# Altium PCB PCB.PcbDoc
Units mm, origin at the board's own origin, x right, y up, seen from the top; angles counter-clockwise.
Board outline 79 x 62 mm, 4 copper layers (Top Layer, Mid-Layer 1, Mid-Layer 2, Bottom Layer), stack 1.448 mm thick; 26 components, 26 nets, 103 pads, 28 vias.
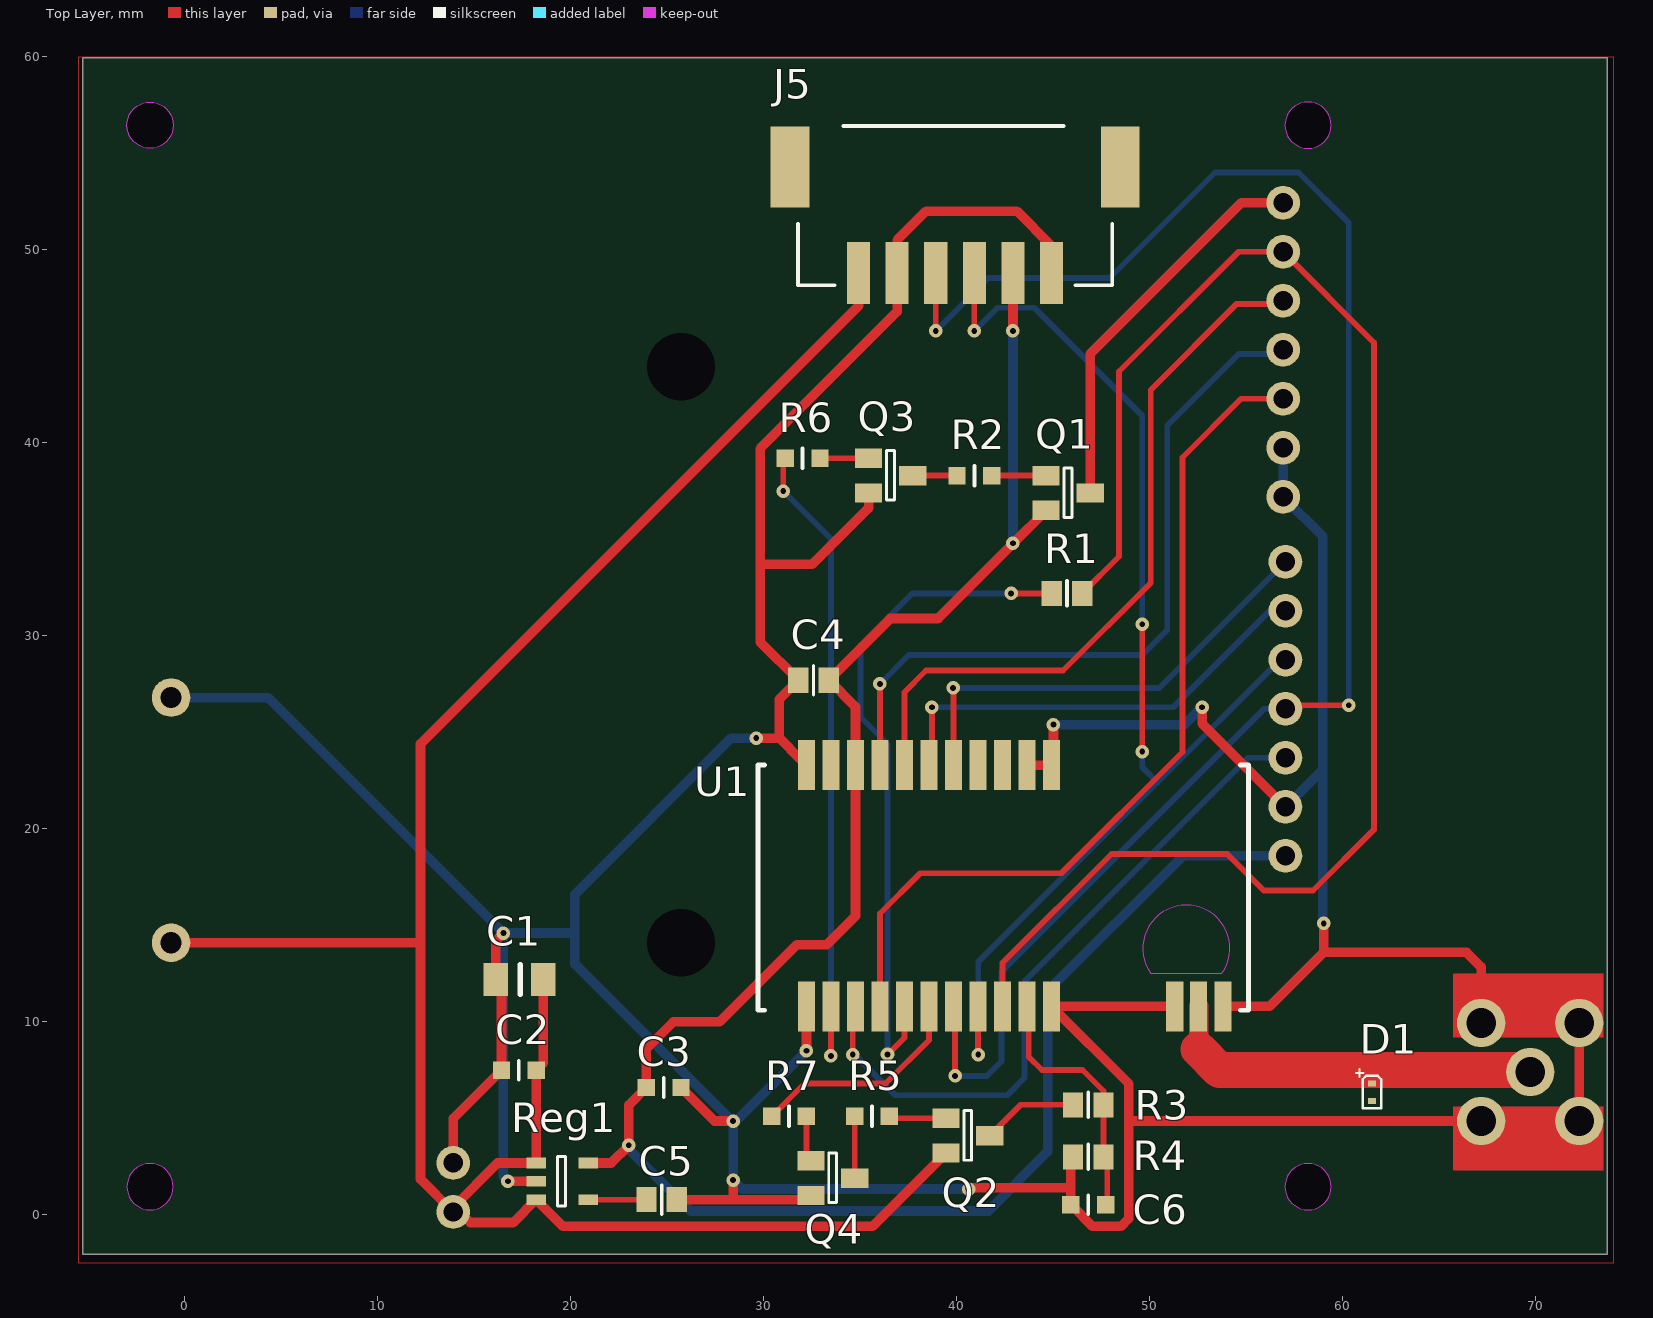
[diagram p0: Top Layer view]
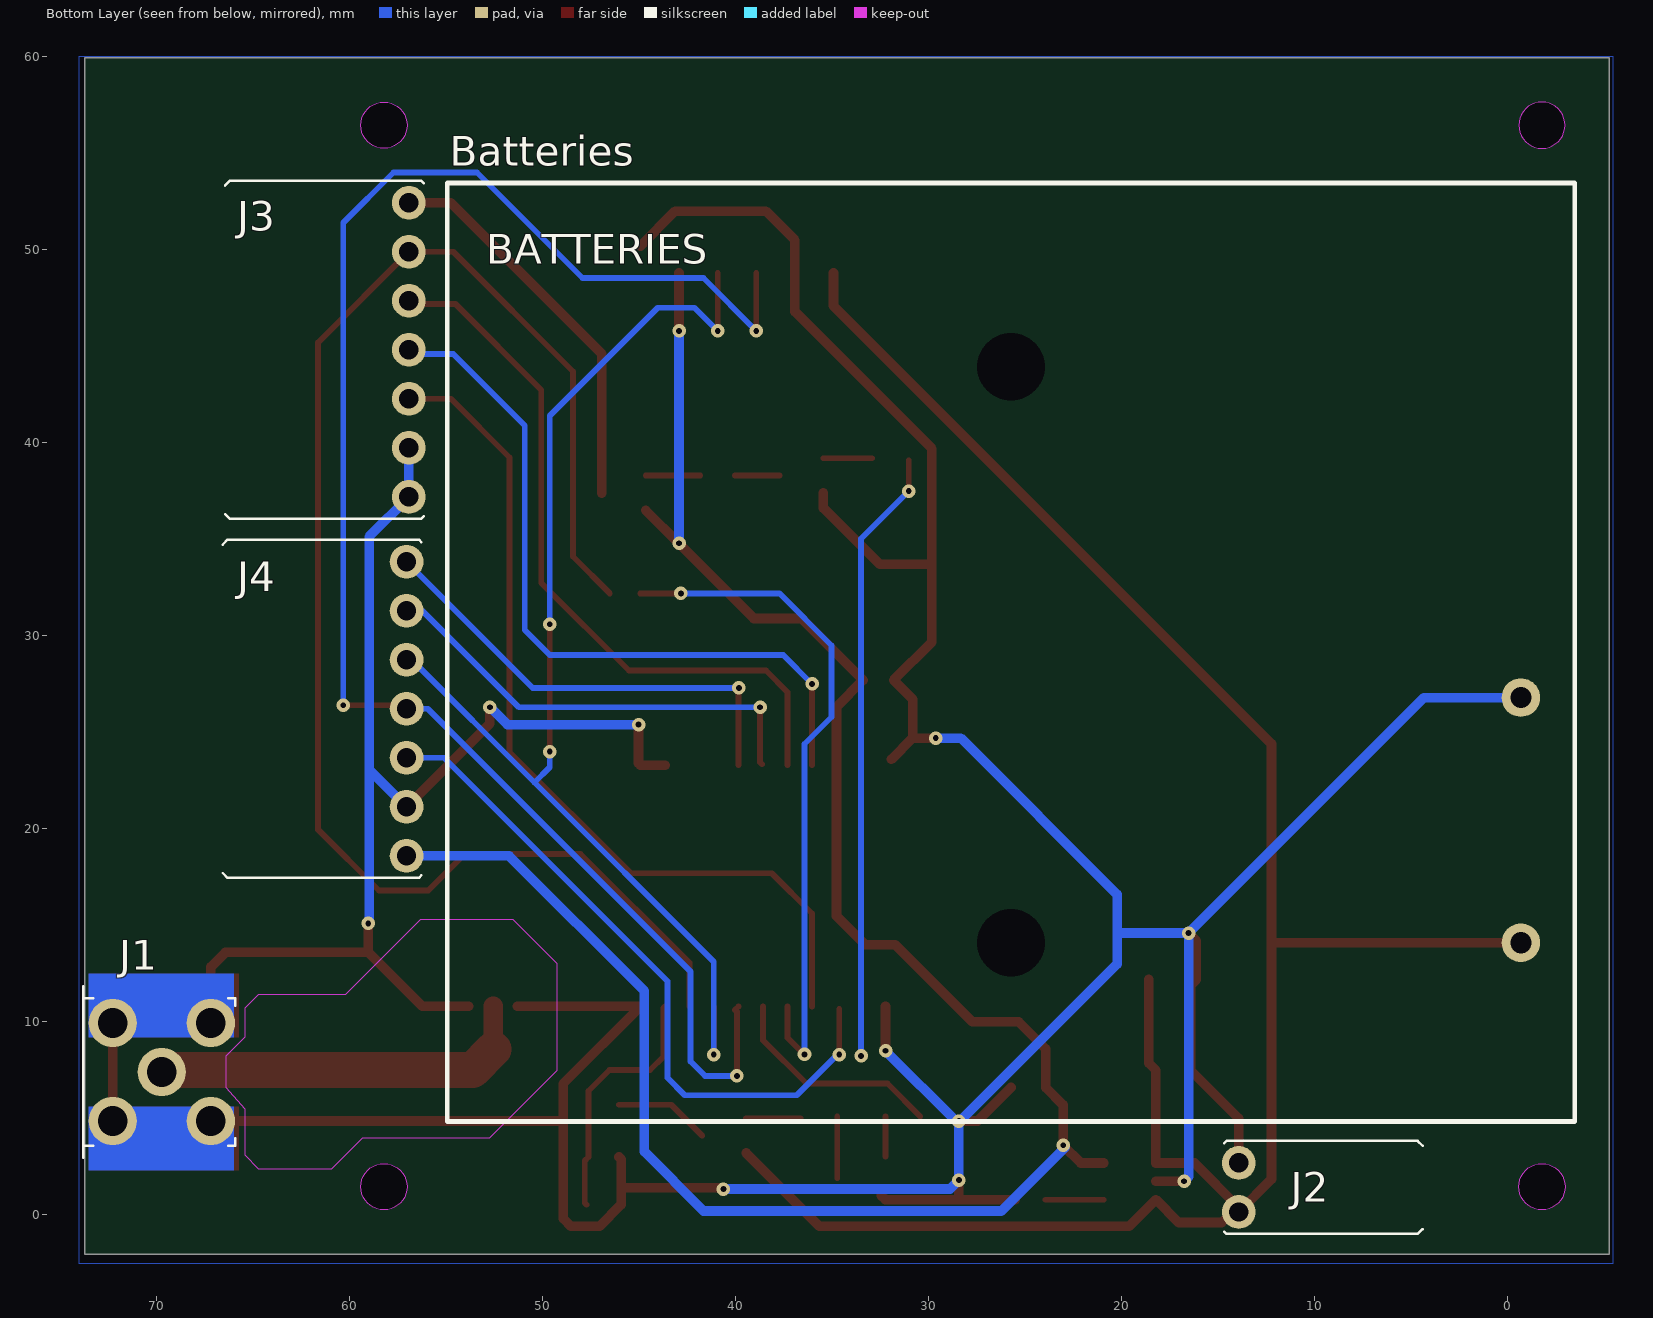
[diagram p1: Bottom Layer view, seen from below]
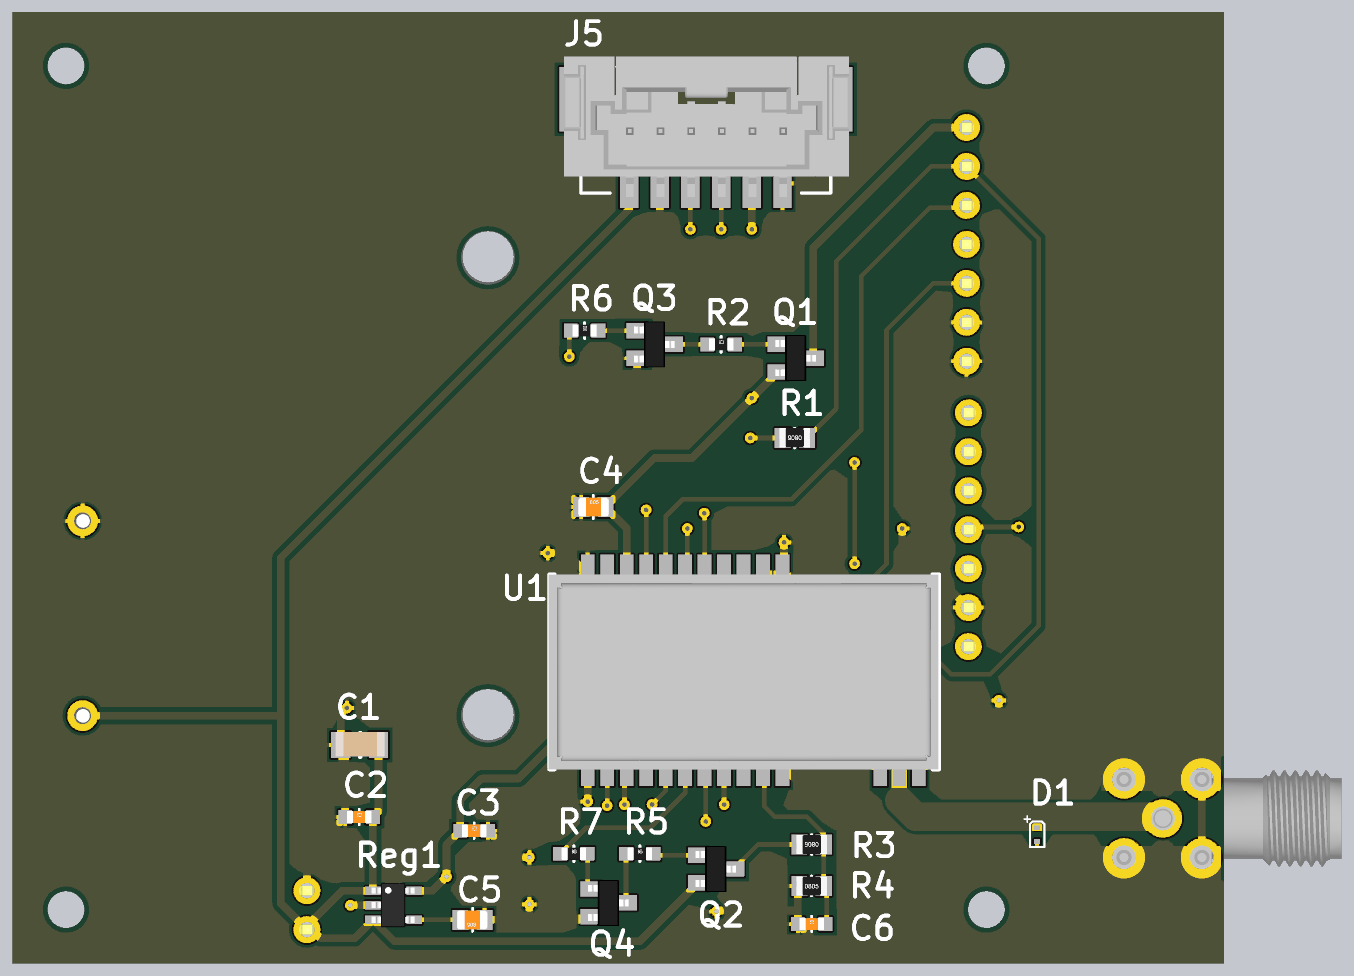
[diagram p2: 3D render of the assembled board from above, using the file's embedded part models]
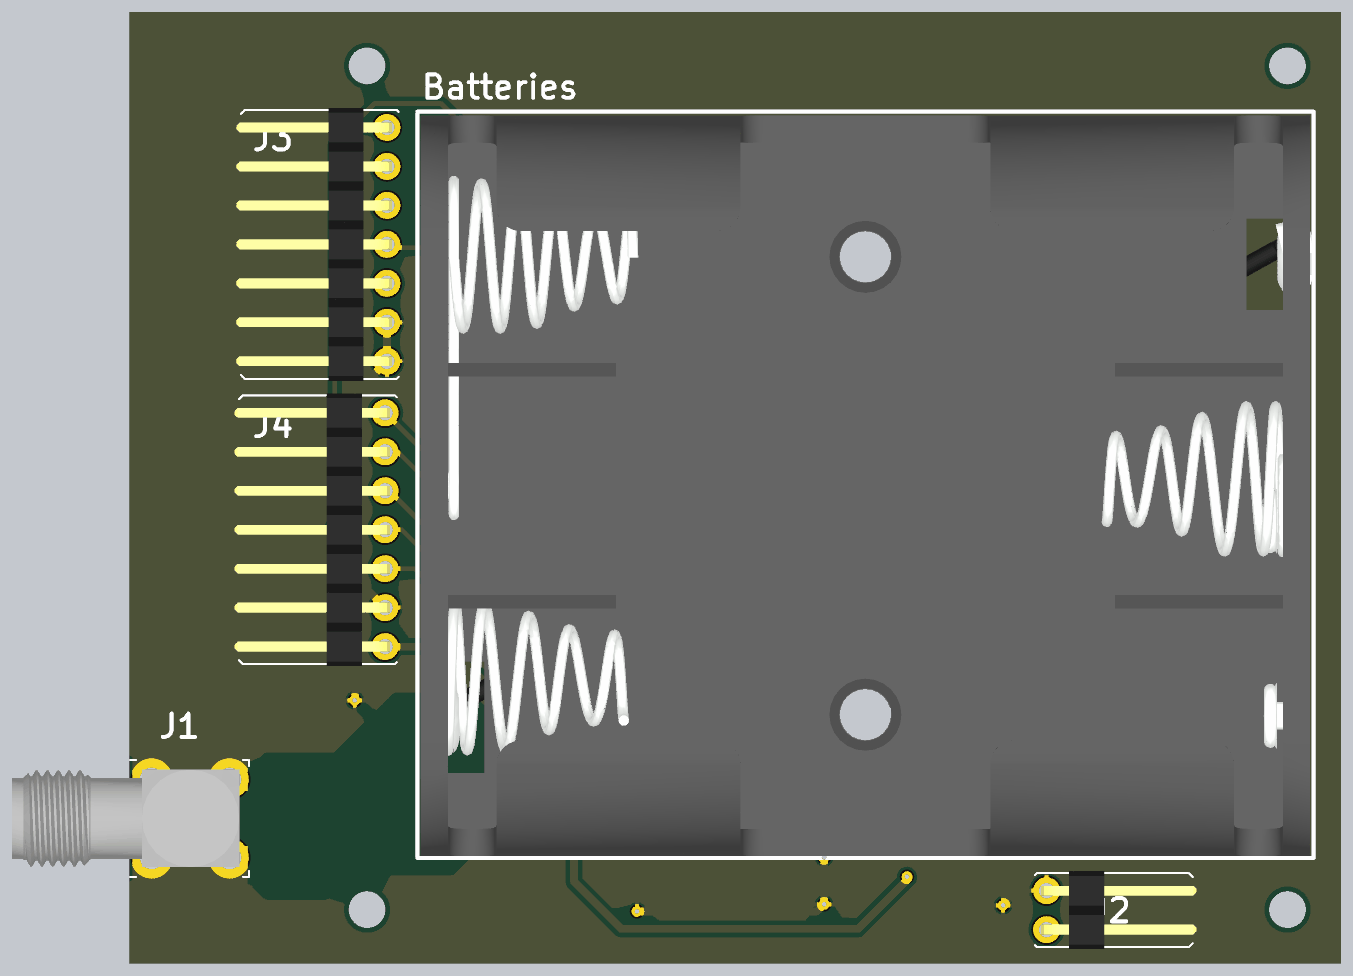
[diagram p3: 3D render of the assembled board from below, using the file's embedded part models]

## Layer stack, top to bottom
Top Solder: solder mask 0.0102, Solder Resist, Dk 3.5
Top Layer: signal copper 0.0356
Dielectric1: core 0.288, FR-4, Dk 4.8
Mid-Layer 1: signal copper 0.0356
Dielectric2: prepreg 0.73, FR-4, Dk 4.8
Mid-Layer 2: signal copper 0.0356
Dielectric3: core 0.288, FR-4, Dk 4.8
Bottom Layer: signal copper 0.0356
Bottom Solder: solder mask 0.0102, Solder Resist, Dk 3.5

## Board outline
-5.306,-2.044 73.694,-2.044 73.694,59.956 -5.306,59.956
cut-out: 56.994,56.456 ccw(c58.194,56.456) 58.194,55.256 ccw(c58.194,56.456) 59.394,56.456 ccw(c58.194,56.456) 58.194,57.656 ccw(c58.194,56.456)
cut-out: -3.006,1.456 ccw(c-1.806,1.456) -1.806,0.256 ccw(c-1.806,1.456) -0.606,1.456 ccw(c-1.806,1.456) -1.806,2.656 ccw(c-1.806,1.456)
cut-out: 56.994,1.456 ccw(c58.194,1.456) 58.194,0.256 ccw(c58.194,1.456) 59.394,1.456 ccw(c58.194,1.456) 58.194,2.656 ccw(c58.194,1.456)
cut-out: -1.806,55.256 cw(c-1.806,56.456) -3.006,56.456 cw(c-1.806,56.456) -1.806,57.656 cw(c-1.806,56.456) -0.606,56.456 cw(c-1.806,56.456)

## Design rules (kind name [scope] priority, off if disabled: settings)
AssemblyTestPointUsage [All] p1: valid=2
Clearance RF [InNet('RF') vs InNet('GND')] p1: gap=0.2
Clearance [All] p2: gap=0.3
FabricationTestPointUsage [All] p1: valid=2 allowmultiple=FALSE
HoleSize [All] p1: absolutevalues=TRUE maxlimit=5 minlimit=0.025 maxpercent=80.000 minpercent=20.000
MinimumSolderMaskSliver [All] p1: minsoldermaskwidth=0.07
PolygonConnect [All] p1: connectstyle=Relief reliefconductorwidth=0.254 reliefentries=4 polygonreliefangle="90 Angle" airgapwidth=0.254
RoomDefinition schema [InComponentClass('schema')] p1: confinementstyle=ConfineIn formatcopy=TRUE lockcomponents=FALSE outline -5.8,-3.3 81.9,-3.3 81.9,65.3 -5.8,65.3
RoutingVias [All] p1: holewidth=0.3 width=0.7 viastyle="Through Hole" minholewidth=0.3 minwidth=0.7 maxholewidth=4 maxwidth=4
SilkToSilkClearance [All] p1: silktosilkclearance=0.1
SilkToSolderMaskClearance SilkscreenOverComponentPads [IsPad] p1: minsilkscreentomaskgap=0.125 clearancetoexposedcopper=TRUE
SolderMaskExpansion [All] p1: expansion=0.125
Width [All] p1: maxlimit=5 minlimit=0.15 preferedwidth=0.15
24 further rules are at their usual default settings.

## Classes and differential pairs
net class Undefined: SENSOR_1_EN SENSOR_2_EN VBAT VBAT_EN

## Components (designator, comment, footprint, x,y, rotation, side; value= is the part's Value field where it differs from the comment)
Batteries "Comment" KEYSTONE-2464 25.7,14.1 r180 bottom
C1 "CAP-SMD" C1206-STD 16.1,12.191 r0 top
C2 "CAP-SMD" C0603-STD 17.3,7.491 r0 top
C3 "CAP-SMD" C0603-STD 24.8,6.6 r0 top
C4 "CAP-SMD" C0805-STD 32.57,27.7 r0 top
C5 "CAP-SMD" C0805-STD 24.7,0.786 r180 top
C6 "CAP-SMD" C0603-STD 46.8,0.524 r0 top
D1 "ESD9R33ST5G-SOD923" SOD923-SPE-ESD9R33ST5G 61.5,5.9 r90 top
J1 "COAX-RF" SMA-STD-Right_Angle 69.7,7.4 r180 bottom
J2 "CONN-STD-2P_1ROW" CONN-STD-2_254_MALE_HEADER 13.9,2.691 r270 bottom
J3 "CONN-STD-7P_1ROW" CONN-STD-7_254_MALE_HEADER 56.9,37.2 r90 bottom
J4 "CONN-STD-7P_1ROW" CONN-STD-7_254_MALE_HEADER 57.017,18.6 r90 bottom
J5 "CONN-STD-6P_1ROW" CONN-SPE-560020-0620_MOLEX 44.9,48.8 r180 top
Q1 "BC856A-SOT23" SOT23-STD 46.9,37.4 r180 top
Q2 "BC856A-SOT23" SOT23-STD 41.7,4.1 r180 top
Q3 "BC846ALT1-SOT23" SOT23-STD 37.7,38.3 r180 top
Q4 "BC846ALT1-SOT23" SOT23-STD 34.7,1.9 r180 top
R1 "RES-SMD" R0805-STD 45.7,32.2 r180 top
R2 "RES-SMD" R0603-STD 40.9,38.3 r0 top
R3 "RES-SMD" R0805-STD 46.8,5.7 r180 top
R4 "RES-SMD" R0805-STD 46.8,3 r0 top
R5 "RES-SMD" R0603-STD 35.6,5.1 r0 top
R6 "RES-SMD" R0603-STD 32,39.2 r0 top
R7 "RES-SMD" R0603-STD 31.3,5.1 r0 top
Reg1 "TPS73133DBVTG4-SOT23_5" SOT23_5-SPE-TPS73133DBVTG4 18.2,2.691 r0 top
U1 "TD1208-LGA25" LGA25-SPE-TD1208 44.9,23.3 r180 top

## Footprints (in the part's own frame and the unit in brackets; to place one, negate y for a bottom-side part, rotate by r counter-clockwise, add the part's x,y. Pads: shape width x height; smd on the part's side, far side on the other; paste and mask are expansions set on the pad)
C0603-STD [mm]
  rect 0.9x0.9 smd: 1(-0.9,0) 2(0.9,0)
  silkscreen extent 0,-0.51 0,0.51, body extent -0.8,-0.4 0.8,0.4, height 0.3
C0805-STD [mm]
  rect 1.05x1.3 smd: 1(-0.787,0) 2(0.787,0)
  silkscreen extent 0,-0.76 0,0.76, body extent -0.98,-0.62 1.02,0.62, height 0.76
C1206-STD [mm]
  rect 1.25x1.7 smd: 1(0,0) 2(2.464,0)
  silkscreen extent 1.27,-0.76 1.27,0.76, body extent -0.33,-0.76 2.87,0.84, height 0.79
CONN-SPE-560020-0620_MOLEX [mm]
  rect 1.2x3.2 smd: 1(0,0) 2(2,0) 3(4,0) 4(6,0) 5(8,0) 6(10,0)
  rect 2x4.2 smd: M1(-3.55,-5.48) M2(13.55,-5.48)
  silkscreen extent -3.15,-7.62 13.15,0.64, body extent -4.35,-8.26 14.25,0.89, height 7.99
CONN-STD-2_254_MALE_HEADER [mm]
  round 1.75 hole 1: 1(0,0) 2(2.54,0)
  silkscreen extent -1.14,-0.76 3.68,9.53, body extent -1.27,-0.37 3.81,9.76, height 2.51
CONN-STD-7_254_MALE_HEADER [mm]
  round 1.75 hole 1: 1(0,0) 2(2.54,0) 3(5.08,0) 4(7.62,0) 5(10.16,0) 6(12.7,0) 7(15.24,0)
  silkscreen extent -1.14,-0.76 16.38,9.53, body extent -1.27,-0.32 16.51,9.81, height 2.51
KEYSTONE-2464 [mm]
  round 2 hole 1.1: 1(26.42,0) 2(26.42,12.7)
  round 1.524 hole 3.5 unplated: X(0,0) X(0,29.85)
  silkscreen extent -29.21,-9.27 29.21,39.37, body extent -29.01,-9.16 29.08,39.13, height 16.9
LGA25-SPE-TD1208 [mm]
  rect 0.89x2.6 smd: 1(0,0) 2(1.27,0) 3(2.54,0) 4(3.81,0) 5(5.08,0) 6(6.35,0) 7(7.62,0) 8(8.89,0) 9(10.16,0) 10(11.43,0) 11(12.7,0) 12(12.7,12.5) 13(11.43,12.5) 14(10.16,12.5) 15(8.89,12.5) 16(7.62,12.5) 17(6.35,12.5) 18(5.08,12.5) 19(3.81,12.5) 20(2.54,12.5) 21(1.27,12.5) 22(0,12.5) 23(-6.38,12.5) 24(-7.62,12.5) 25(-8.89,12.5)
  Top Layer keep-out region: -8.831,10.795 -9.221,9.786 -9.095,8.711 -8.483,7.818 -7.526,7.314 -6.444,7.314 -5.487,7.818 -4.875,8.711 -4.749,9.786 -5.139,10.795 -5.139,10.795
  silkscreen extent -10.2,0 15.2,12.7, body extent -10.16,0 15.24,12.7, height 3.55
R0603-STD [mm]
  rect 0.9x0.9 smd: 1(-0.9,0) 2(0.9,0)
  silkscreen extent 0,-0.51 0,0.51, body extent -0.8,-0.4 0.8,0.4, height 0.3
R0805-STD [mm]
  rect 1.05x1.3 smd: 1(-0.787,0) 2(0.787,0)
  silkscreen extent 0,-0.64 0,0.64, body extent -1,-0.64 1,0.61, height 0.6
SMA-STD-Right_Angle [mm]
  round 2.5 hole 1.54: 1(0,0) 2(-2.54,-2.54) 2(-2.54,2.54) 2(2.54,-2.54) 2(2.54,2.54)
  silkscreen extent -4.06,-4.44 3.81,4.45, body extent -11.63,-3.18 3.17,3.18, height 10.07
SOD923-SPE-ESD9R33ST5G [mm]
  rect 0.3x0.4 smd: A(0,0) K(0.9,0)
  silkscreen extent -0.38,-0.48 1.65,0.83, body extent -0.07,-0.32 0.97,0.32, height 0.43
SOT23-STD [mm]
  rect 1.4x1 smd: 1(2.275,-0.9) 2(2.275,0.9)
  rect 1.425x1 smd: 3(0,0)
  silkscreen extent 0.94,-1.3 1.35,1.27, body extent -0.18,-1.5 2.46,1.5, height 1.08
SOT23_5-SPE-TPS73133DBVTG4 [mm]
  rect 1x0.55 smd: 1(0,-0.005) 2(0,-0.955) 3(0,-1.905) 4(2.7,-1.905) 5(2.7,-0.005)
  silkscreen extent 1.11,-2.23 1.51,0.34, body extent -0.08,-2.39 2.72,0.51, height 1.43

## Part data
C1: library part C1206C106K3RACxx, "1206 10uF / 25V X7R ceramic capacitor"
C2 C3 C6: library part C0603C104K3RACXX, "0603 100nF /25V X7R ceramic capacitor"
C4: library part C0805C106K9PACxx, "0805 10uF / 6.3V X5R ceramic capacitor"
C5: library part VJ0805Y103KXAxx, "0805 10nF / 50V X7R ceramic capacitor"
D1: library part ESD9R3.3ST5G, "Diode TVS 3.3V in SMD package"
J1: library part 73391-0080, "SMA Right Angle"
J2: library part 826949-2, "2 PIN, 2.54mm pitch, 1 row, right angle, male"
J3 J4: library part 826949-7, "7 PIN, 2.54mm pitch, 1 row, right angle, male"
J5: library part 560020-0620, "6 pin, 2mm pitch herader, SM, ST"
Q1 Q2: library part BC856A, "PNP small signal transistor"
Q3 Q4: library part BC846ALT1, "NPN small signal transistor"
R1: library part CRCW080530K0FKxx, "30k Ohm 0805 SMD resistor"
R2 R5: library part CRCW06031K00FKxx, "1k Ohm 0603 SMD resistor"
R3 R4: library part CRCW0805100KFKxx, "100k Ohm 0805 SMD resistor"
R6 R7: library part CRCW060322K0FKxx, "22k Ohm 0603 SMD resistor"
Reg1: library part TPS73133, "3.3V / 150mA LDO voltage regulator"
U1: library part TD1208-C32, "Sigfox module"

## Via types
v1: diameter 0.7, hole 0.3, Top Layer to Bottom Layer, 28 vias

## Nets (pads, with @x,y where several pads share a name; then routed paths per layer and width w, separated by ;. In a path a pad name is that pad's centre, name@x,y a point inside that pad or via, vN(x,y) a via of type N, cw(c..) or ccw(c..) an arc to the next point about the centre after c; other vN are vias at no path point)
3.3V: C3.1 C4.2 J4.1 J5.2 Q1.2 Reg1.5 U1.9 | length 111.4
  Top Layer w0.5: Reg1.5 22.085,2.686 v1(22.999,3.6) 22.999,5.699 C3.1 23.9,8.6 25.3,10 27.7,10 31.7,14 33.257,14 34.74,15.483 U1.9 34.74,26.317 C4.2 36.557,30.9 39.025,30.9 v1@42.913,34.787 ; v1(42.9,34.8) v1@42.913,34.787 ; v1(42.9,45.8) J5.2 ; Q1.2 v1@42.913,34.787
  Bottom Layer w0.5: v1(22.999,3.6) 22.9,3.5 26.2,0.2 41.63,0.2 44.7,3.27 44.7,11.6 51.7,18.6 J4.1 ; v1(42.9,34.8) v1(42.9,45.8)
5V: Batteries.1 C1.2 C2.2 J2.2 J5.6 Q2.2 Reg1.1 Reg1.3 | length 114.9
  Top Layer w0.3: 12.1,14.1 12.2,14.2
  Top Layer w0.5: Batteries.1 12.1,14.1 ; J2.2@14.23,0.151 14.781,-0.4 17.014,-0.4 Reg1.3 19.586,-0.6 35.625,-0.6 Q2.2 ; C1.2 18.564,7.855 C2.2 Reg1.1 16.196,2.686 13.9,0.39 J2.2 12.2,1.851 12.2,14.2 12.2,24.4 34.9,47.1 J5.6
DB2: J4.6 U1.6 | length 23.4
  Top Layer w0.3: U1.6@38.6,23.35 38.7,23.45 v1(38.7,26.3)
  Bottom Layer w0.3: v1(38.7,26.3) 51.2,26.3 56.2,31.3 J4.6
DB3: J4.7 U1.5 | length 23.9
  Top Layer w0.3: v1(39.8,27.3) 39.82,27.28 U1.5
  Bottom Layer w0.3: v1(39.8,27.3) 50.477,27.3 J4.7
GND: Batteries.2 C1.1 C2.1 C3.2 C4.1 C5.1 C6.1 D1.A J1.2 J2.1 J3.1 J3.2 J4.2 J5.1 J5.5 Q3.2 Q4.2 R4.1 Reg1.2 U1.1 U1.2 U1.11 U1.12 U1.22 U1.23 U1.25 | length 295.7
  Top Layer w0.5: J2.1 13.9,4.991 C2.1 16.4,11.891 C1.1 16.1,14.2 v1(16.5,14.6) ; v1(16.736,1.736) Reg1.2 ; C5.1 28.4,0.786 ; C3.2 27.44,4.86 v1(28.4,4.86) ; v1(28.4,1.8) 28.4,0.786 ; v1(29.6,24.7) 30.8,24.7 ; U1.11@31.9,23.6 30.8,24.7 ; v1(32.2,8.5) U1.12 ; Q4.2 32.211,0.786 28.4,0.786 ; Q3.2 35.425,36.625 32.5,33.7 29.8,33.7 ; v1(40.6,1.338) 40.662,1.4 45.9,1.4 ; U1.2 U1.1 45,23.4 v1(45,25.4) ; J5.1@44.9,50.2 43.1,52 38.4,52 36.9,50.5 J5.5 36.9,46.8 29.8,39.7 29.8,33.7 ; R4.1 45.9,2.887 45.9,1.4 ; U1.23 U1.22 48.9,6.8 48.9,4.86 ; v1(52.7,26.3) 52.7,25.457 J4.2 ; U1.25 56.2,10.8 59,13.6 ; v1(59,15.1) 59,13.6 ; 29.8,33.7 29.8,29.683 C4.1 30.8,26.717 30.8,24.7 ; 45.9,1.4 C6.1 47.024,-0.6 48.5,-0.6 48.9,-0.2 48.9,4.86 ; 48.9,4.86 67.16,4.86 72.24,4.86 72.24,9.94 67.16,9.94 67.16,12.84 66.4,13.6 59,13.6
  Bottom Layer w0.5: Batteries.2 4.3,26.8 v1(16.5,14.6) ; v1(16.736,1.736) 16.5,1.972 v1(16.5,14.6) ; 20.2,14.6 v1(16.5,14.6) ; v1(29.6,24.7) 28.3,24.7 20.2,16.6 20.2,12.999 v1@28.4,4.799 ; v1(32.2,8.5) 28.499,4.799 v1@28.4,4.799 ; v1(40.6,1.338) 28.862,1.338 v1(28.4,1.8) v1@28.4,4.799 ; v1(45,25.4) 51.8,25.4 v1(52.7,26.3) ; J3.2 J3.1 58.959,35.141 58.959,23.082 ; J4.2 58.959,23.082 ; v1(59,15.1) 58.959,15.141 58.959,23.082
NetC5_2: C5.2 Reg1.4 | length 3
  Top Layer w0.3: Reg1.4 C5.2
NetQ1_1: Q1.1 R2.2 | length 2.8
  Top Layer w0.3: R2.2 Q1.1
NetQ2_1: Q2.1 R5.2 | length 2.8
  Top Layer w0.3: R5.2@36.6,5 Q2.1
NetQ2_3: Q2.3 R3.2 | length 5
  Top Layer w0.3: Q2.3 43.3,5.7 R3.2
NetQ3_1: Q3.1 R6.2 | length 2.5
  Top Layer w0.3: R6.2 Q3.1
NetQ3_3: Q3.3 R2.1 | length 2.3
  Top Layer w0.3: Q3.3 R2.1
NetQ4_1: Q4.1 R7.2 | length 2.1
  Top Layer w0.3: Q4.1@32.2,3.025 R7.2
NetQ4_3: Q4.3 R5.1 | length 3.2
  Top Layer w0.3: Q4.3 R5.1
RF: D1.K J1.1 U1.24 | length 19.7
  Top Layer w1: 52.52,8.58 U1.24
  Top Layer w1.86: 52.52,8.58 53.6,7.5 J1.1@69.6,7.5
RST: J4.3 U1.14 | length 35.8
  Top Layer w0.3: v1(34.6,8.3) U1.14@34.6,10.66
  Bottom Layer w0.3: v1(34.6,8.3) 34.7,8.3 36.8,6.2 42.6,6.2 43.5,7.1 43.5,12.1 55.08,23.68 J4.3
RX: J4.5 J5.3 U1.19 | length 63.6
  Top Layer w0.3: v1(40.9,45.8) J5.3 ; U1.19 41.09,8.31 v1(41.1,8.3) ; v1(49.6,24) v1(49.6,30.6)
  Bottom Layer w0.3: v1(40.9,45.8) 42.1,47 44,47 49.6,41.4 v1(49.6,30.6) ; v1(41.1,8.3) 41.1,13.11 50.39,22.4 ; v1(49.6,24) 49.6,23.19 50.39,22.4 ; J4.5 56.75,28.76 50.39,22.4
SCL: J3.4 U1.8 | length 38.5
  Top Layer w0.3: U1.8 v1(36.01,27.51)
  Bottom Layer w0.3: v1(36.01,27.51) 37.5,29 49.6,29 50.9,30.3 50.9,40.9 54.6,44.6 56.68,44.6 J3.4
SDA: J3.5 U1.7 | length 37.7
  Top Layer w0.3: U1.7 37.28,27.08 38.4,28.2 45.5,28.2 50.039,32.739 50.039,42.739 54.5,47.2 56.74,47.2 J3.5
SENSOR_1: J3.3 U1.15 | length 45.7
  Top Layer w0.3: U1.15 36.01,15.618 38.092,17.7 45.4,17.7 51.68,23.98 51.68,39.24 54.72,42.28 J3.3
SENSOR_1_EN: R6.1 U1.13 | length 34.5
  Top Layer w0.3: v1(31,37.5) R6.1@31,39.1 ; v1(33.47,8.23) U1.13
  Bottom Layer w0.3: v1(31,37.5) 33.47,35.03 v1(33.47,8.23)
SENSOR_1_PWR: J3.7 Q1.3 | length 20.4
  Top Layer w0.5: Q1.3 46.9,44.6 54.74,52.44 J3.7
SENSOR_2: J3.6 R1.1 U1.20 | length 81.2
  Top Layer w0.3: U1.20 42.36,13.06 48,18.7 54,18.7 55.9,16.8 58.444,16.8 61.6,19.956 61.6,45.2 J3.6 54.6,49.9 48.4,43.7 48.4,34.113 R1.1
SENSOR_2_EN: R1.2 U1.16 | length 35.7
  Top Layer w0.3: v1(36.4,8.31) 36.4,8.3 37.28,9.18 U1.16 ; v1(42.8,32.2) R1.2
  Bottom Layer w0.3: v1(36.4,8.31) 36.4,24.4 35,25.8 35,29.5 37.7,32.2 v1(42.8,32.2)
TX: J4.4 J5.4 U1.18 | length 88.7
  Top Layer w0.3: v1(38.9,45.8) J5.4 ; U1.18 40,10.62 39.9,10.52 v1(39.9,7.2) ; J4.4@57.097,26.3 57.197,26.4 v1(60.3,26.4)
  Bottom Layer w0.3: v1(38.9,45.8) 41.635,48.535 47.9,48.535 53.365,54 57.7,54 60.3,51.4 v1(60.3,26.4) v1@60.3,26.3 ; v1(39.9,7.2) 41.55,7.2 42.3,7.95 42.3,12.6 55.92,26.22 J4.4
VBAT: C6.2 R3.1 R4.2 U1.21 | length 13.3
  Top Layer w0.3: U1.21 43.717,10.713 43.717,8.183 44.4,7.5 46.5,7.5 47.587,6.413 R3.1 R4.2 47.787,2.8 47.787,0.611 C6.2
VBAT_EN: R7.1 U1.17 | length 11.5
  Top Layer w0.3: R7.1 32.1,6.8 36.3,6.8 38.55,9.05 U1.17
pads on no net: Batteries.X J5.M1 J5.M2 U1.3 U1.4 U1.10

## Polygon pours and split planes (outlines as drawn)
GND on Top Layer "GND_TOP" (solid, remove dead copper, shelved, pour order 6): -5.5,60 74,60 74,-2.5 -5.5,-2.5
GND on Bottom Layer "GND_BTM" (solid, remove dead copper, shelved, pour order 8): -5.5,60 74,60 74,-2.5 -5.5,-2.5

## Keep-outs
Bottom Layer:
  region: 66.385,8.215 66.385,6.6 65.4,5.5 65.4,3.1 64.7,2.4 60.9,2.4 59.3,4 52.7,4 49.2,7.5 49.2,13 51.5,15.3 56.3,15.3 60.2,11.4 64.7,11.4 65.4,10.7 65.4,9.2

## Other copper
Top Layer:
  rectangle net GND: 65.7,9.2 73.5,12.505
  rectangle net GND: 65.7,2.3 73.5,5.605
Bottom Layer:
  rectangle net GND: 65.972,2.3 73.5,5.605
  rectangle net GND: 65.972,9.2 73.5,12.505

## Silkscreen, mask and mechanical layers (free items; w line width, h text height)
Top Overlay:
  text ".ASsyDocumentNumber" at 179.784,-98.179 h1.52
Bottom Overlay:
  text ".ASsyDocumentNumber" at -75.192,-98.563 h1.52
cutout:
  circle w0.013: c-154.72,-111.741 r0.03
  circle w0.013: c-156.244,-111.741 r0.03
  circle w0.013: c-156.244,-113.138 r0.03
  circle w0.013: c-154.72,-113.138 r0.03
  lines w0.013: -156.333,-113.227 -156.333,-111.652 -154.327,-111.652 -154.327,-113.227 -156.333,-113.227
Mechanical 8:
  circle w0.3: c58.194,56.456 r1.2
  circle w0.3: c58.194,1.456 r1.2
  circle w0.3: c-1.806,1.456 r1.2
  circle w0.3: c-1.806,56.456 r1.2
  lines w0.3: -5.306,-2.044 73.694,-2.044 73.694,59.956 -5.306,59.956 -5.306,-2.044
Mechanical 16:
  drawing of 2593 lines, arcs and shapes, not listed
  text "1" at -118.995,173.036 h1.78
  text "2" at -69.956,173.036 h1.78
  text "3" at -20.697,173.036 h1.78
  text "4" at 28.596,173.036 h1.78
  text "5" at 77.872,173.036 h1.78
  text "6" at 126.894,173.036 h1.78
  text "7" at 176.424,173.036 h1.78
  text "8" at 225.446,173.036 h1.78
  text "A" at -141.127,139.051 h1.78
  text "A" at 247.493,139.051 h1.78
  text "B" at -141.127,68.439 h1.78
  text "B" at 247.493,68.439 h1.78
  text "C" at -141.127,-2.173 h1.78
  text "D" at -141.127,-72.277 h1.78
  text "D" at 247.493,-72.277 h1.78
  text "Verifie par:" at 132.558,-72.455 h1.14
  text "Nom de la carte:" at 170.658,-72.455 h1.14
  text ".VerifEngineer" at 138.184,-75.651 h1.52
  text ".boardName" at 182.664,-76.035 h1.52
  text "Nom du Projet" at 170.531,-78.805 h1.14
  text "dessine par:" at 132.558,-79.948 h1.14
  text ".projectTitle" at 182.984,-82.435 h1.52
  text ".designEngineer" at 138.376,-83.139 h1.52
  text "3 Av didier Daurat" at 101.092,-87.376 h1.52
  text "DATE:" at 132.558,-87.695 h1.14
  text "PART NO.:" at 170.658,-87.695 h1.14
  text "Revision" at 223.998,-87.695 h1.14
  text ".PRINT_DATE" at 133.828,-90.743 h1.78
  text "31400 Toulouse" at 103.022,-91.186 h1.52
  text ".boardrevision" at 224.409,-91.186 h1.52
  text ".boardPartNumber" at 179.336,-91.203 h1.52
  text "NOM DU FICHIER:" at 132.558,-95.315 h1.14
  text "Document: No:" at 170.658,-95.315 h1.14
  text "Echelle:" at 223.998,-95.315 h1.14
  text "1:1" at 229.96,-97.923 h1.52
  text ".PCB_FILE_NAME_NO_PATH" at 132.08,-98.425 h1.78
  text "1" at -118.995,-103.824 h1.78
  text "2" at -69.956,-103.824 h1.78
  text "3" at -20.697,-103.824 h1.78
  text "4" at 28.596,-103.824 h1.78
  text "5" at 77.872,-103.824 h1.78
  text "6" at 126.894,-103.824 h1.78
  text "7" at 176.424,-103.824 h1.78
  text "8" at 225.446,-103.824 h1.78
Drill Drawing:
  text "!! Place stackup legend here !!" at -111.224,-20.291 h1.52
  text "NOTA : Toutes les dimensions en mm" at 95.752,-67.779 h1.52
  text ".DrillDocumentNumber" at 178.568,-98.243 h1.52
Mechanical 17:
  lines w0.127: -143.068,-34.926 -137.988,-34.926 ; -143.068,35.559 -137.988,35.559 ; -143.068,106.044 -137.988,106.044 ; -137.988,-92.711 -23.688,-92.711 ; -137.988,-85.091 -23.688,-85.091 ; -115.128,-100.331 -115.128,-85.091 ; -93.792,-105.411 -93.792,-100.331 ; -93.792,171.449 -93.792,176.529 ; -61.788,-100.331 -61.788,-85.091 -61.788,-69.851 ; -61.788,-77.471 -23.688,-77.471 ; -44.516,-105.411 -44.516,-100.331 ; -44.516,171.449 -44.516,176.529 ; 4.633,-105.411 4.633,-100.331 ; 4.633,171.449 4.633,176.529 ; 53.782,-105.411 53.782,-100.331 ; 53.782,171.449 53.782,176.529 ; 103.058,-105.411 103.058,-100.331 ; 103.058,171.449 103.058,176.529 ; 152.207,-105.411 152.207,-100.331 ; 152.207,171.449 152.207,176.529 ; 201.356,-105.411 201.356,-100.331 ; 201.356,171.449 201.356,176.529 ; 245.552,-34.926 250.632,-34.926 ; 245.552,106.044 250.632,106.044 ; -137.988,-100.331 245.552,-100.331 245.552,171.449 -137.988,171.449 -137.988,-100.331 ; -137.988,-100.331 -23.688,-100.331 ; -137.988,-100.331 -137.988,-69.851 -61.788,-69.851 ; -61.788,-69.851 -23.688,-69.851 ; -23.688,-100.331 11.872,-100.331 11.872,-69.851 -23.688,-69.851 ; -23.688,-100.331 -23.688,-69.851 ; -143.068,-105.411 250.632,-105.411 250.632,176.529 -143.068,176.529 -143.068,-105.411
  text "8" at -117.846,173.1 h1.78
  text "7" at -68.824,173.1 h1.78
  text "6" at -19.294,173.1 h1.78
  text "5" at 29.728,173.1 h1.78
  text "4" at 79.004,173.1 h1.78
  text "3" at 128.297,173.1 h1.78
  text "2" at 177.556,173.1 h1.78
  text "1" at 226.595,173.1 h1.78
  text "A" at -139.893,139.115 h1.78
  text "A" at 248.727,139.115 h1.78
  text "B" at -139.893,68.503 h1.78
  text "B" at 248.727,68.503 h1.78
  text "C" at -139.893,-2.109 h1.78
  text "Nom de la carte:" at -62.357,-71.628 h1.14
  text "Verifie par:" at -24.257,-71.628 h1.14
  text "D" at -139.893,-72.213 h1.78
  text "D" at 248.727,-72.213 h1.78
  text ".VerifEngineer" at -30.584,-75.587 h1.52
  text ".boardName" at -75.064,-75.971 h1.52
  text "Nom du Projet" at -62.23,-77.978 h1.14
  text "dessine par:" at -24.257,-79.121 h1.14
  text ".projectTitle" at -75.384,-82.371 h1.52
  text ".designEngineer" at -30.776,-83.075 h1.52
  text "Revision" at -115.697,-86.868 h1.14
  text "PART NO.:" at -62.357,-86.868 h1.14
  text "DATE:" at -24.257,-86.868 h1.14
  text ".boardrevision" at -116.205,-89.789 h1.52
  text ".PRINT_DATE" at -26.228,-90.679 h1.78
  text ".boardPartNumber" at -71.736,-91.139 h1.52
  text "Echelle:" at -115.697,-94.488 h1.14
  text "Document: No:" at -62.357,-94.488 h1.14
  text "NOM DU FICHIER:" at -24.257,-94.488 h1.14
  text ".PCB_FILE_NAME_NO_PATH" at -26.228,-98.299 h1.78
  text "1:1" at -122.104,-98.499 h1.52
  text "8" at -117.846,-103.76 h1.78
  text "7" at -68.824,-103.76 h1.78
  text "6" at -19.294,-103.76 h1.78
  text "5" at 29.728,-103.76 h1.78
  text "4" at 79.004,-103.76 h1.78
  text "3" at 128.297,-103.76 h1.78
  text "2" at 177.556,-103.76 h1.78
  text "1" at 226.595,-103.76 h1.78

## Text inside footprints (layer, text, board x,y; h text height)
Batteries: Bottom Overlay "BATTERIES" at 52.878,49.279 h1.52